# Altium PCB PCB.PcbDoc
Units mil, origin at the board's own origin, x right, y up, seen from the top; angles counter-clockwise.
Board outline 6000 x 4000 mil, 2 copper layers (Top Layer, Bottom Layer); 18 components, 11 nets, 39 pads, 0 vias.
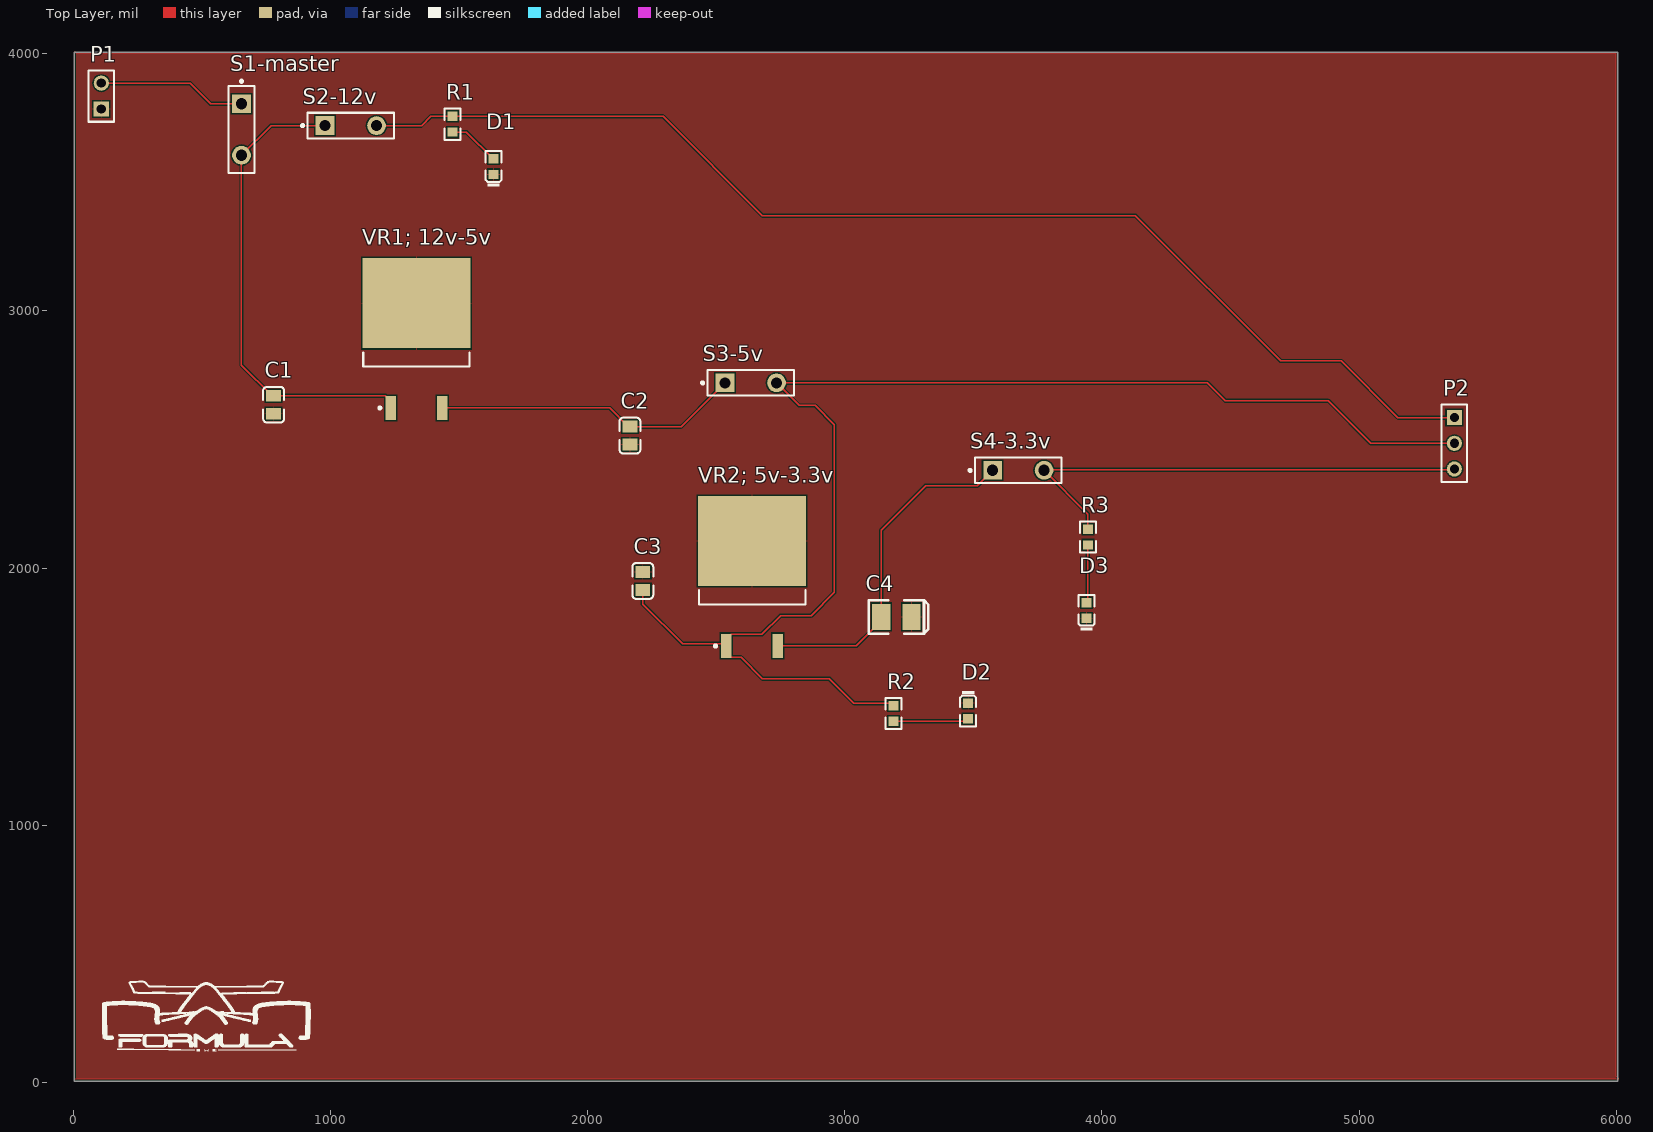
[diagram p0: Top Layer view]
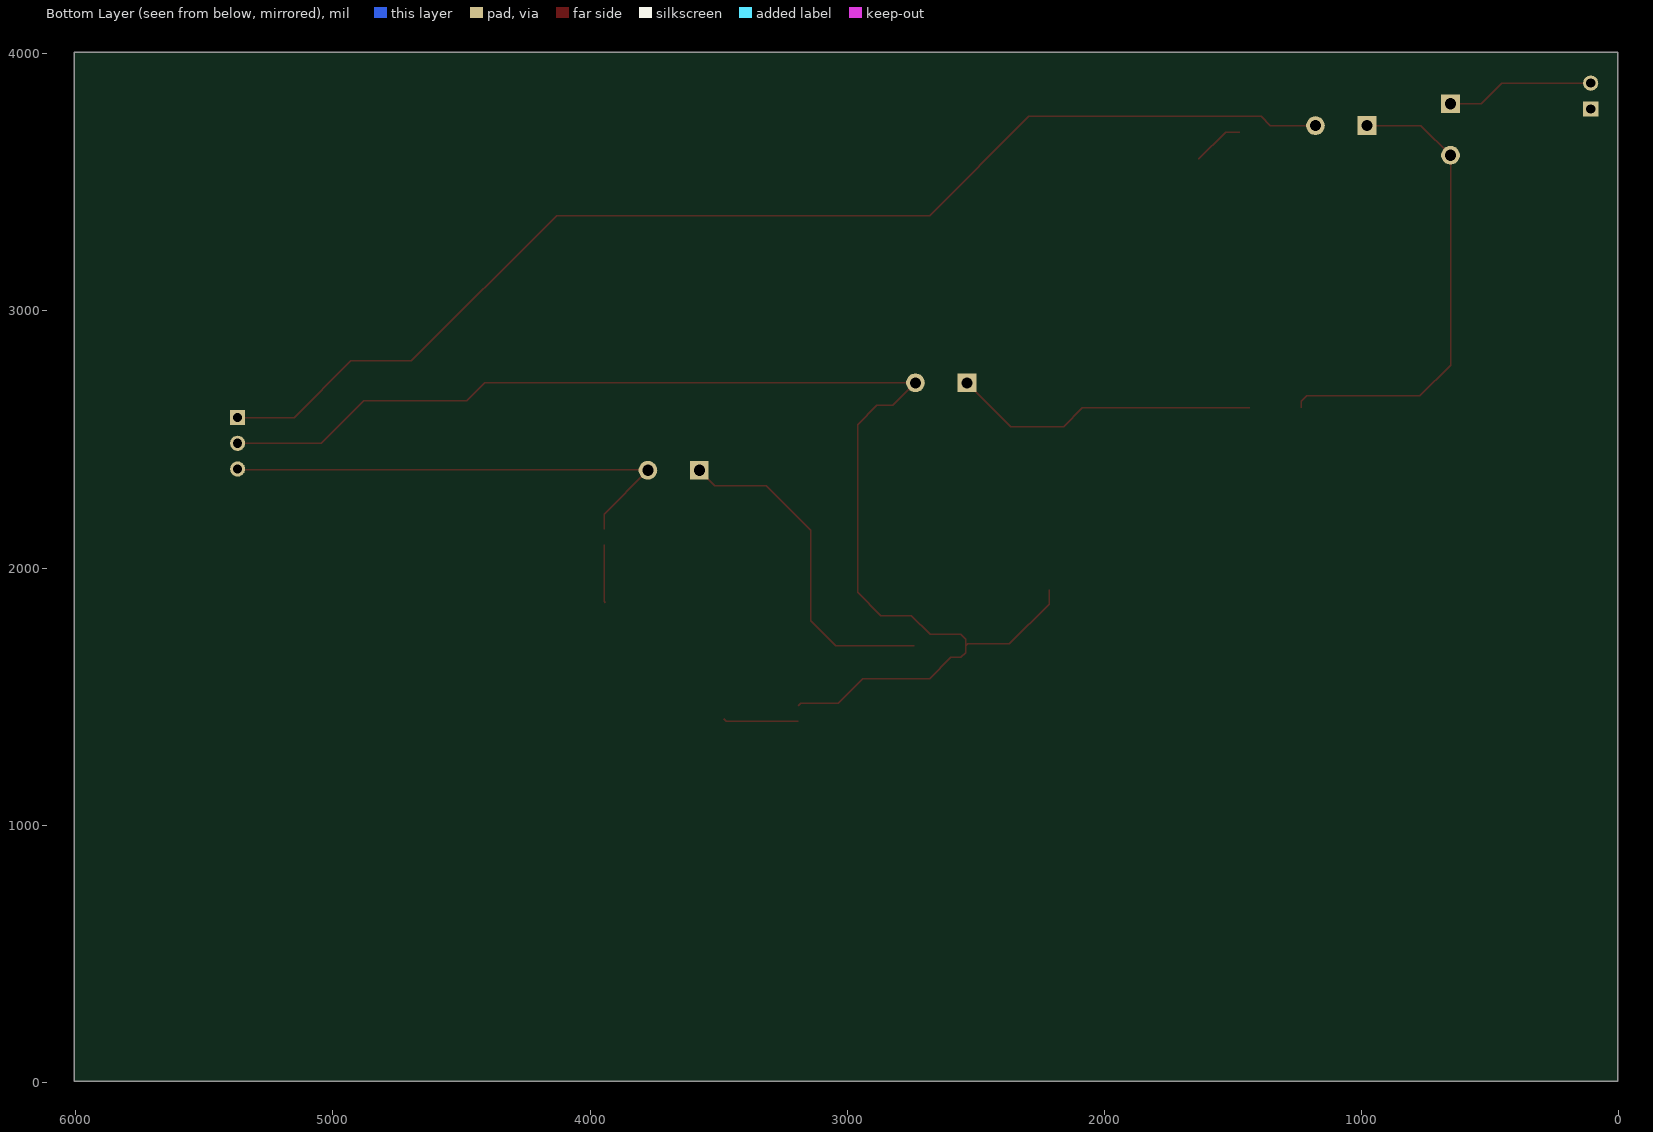
[diagram p1: Bottom Layer view, seen from below]
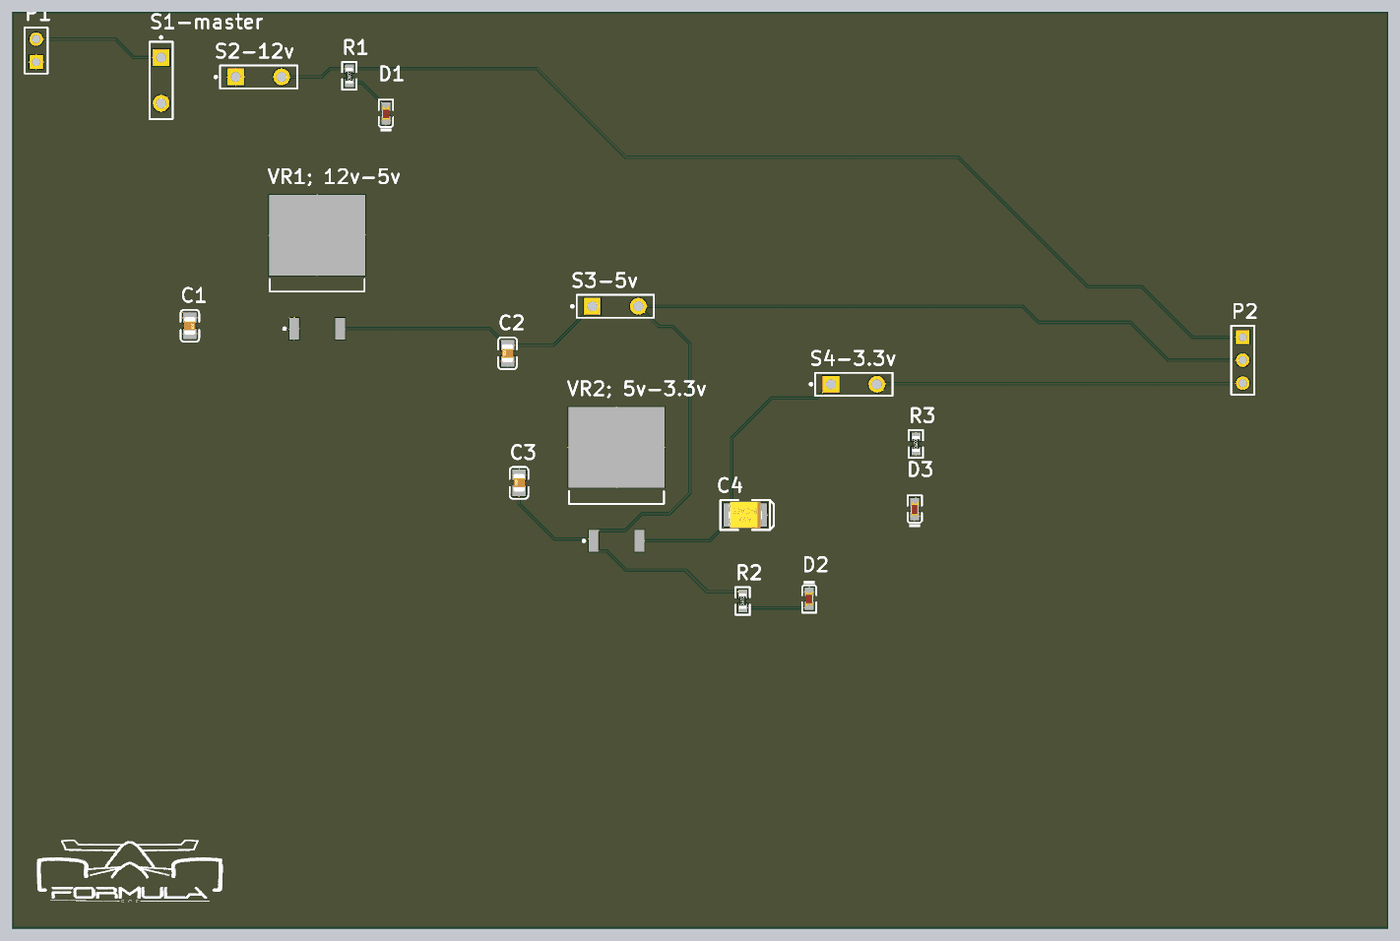
[diagram p2: 3D render of the assembled board from above, using the file's embedded part models]

## Layer stack, top to bottom
Top Solder: solder mask 0.4, Solder Resist, Dk 3.5
Top Layer: signal copper 1.4
Dielectric 1: dielectric 12.6, FR-4, Dk 4.8
Bottom Layer: signal copper 1.4
Bottom Solder: solder mask 0.4, Solder Resist, Dk 3.5

## Board outline
5,5 6005,5 6005,4005 5,4005

## Design rules (kind name [scope] priority, off if disabled: settings)
BoardOutlineClearance [All] p1: gap=7.87 ignorepadtopadclearanceinfootprint=FALSE
Clearance [All] p1: gap=5 ignorepadtopadclearanceinfootprint=FALSE except(9.84: Arc-Hole Track-Hole SMDPad-Hole THPad-Hole Via-Hole Fill-Hole Poly-Hole Region-Hole Text-Hole)
ComponentClearance [All] p1: gap=5 collisioncheckmode=3 verticalgap=5 showdistances=TRUE
DiffPairsRouting [All] p1: maxlimit=10 minlimit=5 mostfreqgap=5 toplayer_minwidth=5 toplayer_maxwidth=1000 toplayer_prefwidth=5 bottomlayer_minwidth=5 bottomlayer_maxwidth=1000 bottomlayer_prefwidth=5 maxuncoupledlength=500
Height [All] p1: minheight=0 maxheight=71497.94 prefheight=500
HoleSize [All] p1: absolutevalues=TRUE maxlimit=248.03 minlimit=11.81 maxpercent=80.000 minpercent=20.000
HoleToHoleClearance [All] p1: gap=9.84 allowstackedmicrovias=FALSE
MinimumAnnularRing [All] p1: minimumring=3
MinimumSolderMaskSliver [All] p1: minsoldermaskwidth=0
PlaneClearance [All] p1: clearance=5
PlaneConnect PlaneConnectPowerPads [InPadClass('PowerPads')] p1: planeconnectstyle=Direct reliefexpansion=20 reliefentries=4 reliefconductorwidth=10 reliefairgap=10
PlaneConnect [All] p2: pad.planeconnectstyle=Relief pad.reliefexpansion=11.81 pad.reliefentries=4 pad.reliefconductorwidth=5 pad.reliefairgap=5 via.planeconnectstyle=Direct via.reliefexpansion=11.81 via.reliefentries=4 via.reliefconductorwidth=5 via.reliefairgap=5
PolygonConnect PolygonConnectPowerPads [All vs (InPadClass('PowerPads'))] p1: connectstyle=Direct reliefconductorwidth=10 reliefentries=4 polygonreliefangle="90 Angle" airgapwidth=10
PolygonConnect [All] p2: thpad.connectstyle=Relief thpad.reliefconductorwidth=5 thpad.reliefentries=4 thpad.polygonreliefangle="90 Angle" thpad.airgapwidth=5 smdpad.connectstyle=Relief smdpad.reliefconductorwidth=5 smdpad.reliefentries=4 smdpad.polygonreliefangle="90 Angle" smdpad.airgapwidth=5 via.connectstyle=Direct via.reliefconductorwidth=5 via.reliefentries=4 via.polygonreliefangle="90 Angle" via.airgapwidth=5
RoutingVias [All] p1: holewidth=11.81 width=23.62 viastyle="Through Hole" minholewidth=11.81 minwidth=23.62 maxholewidth=23.62 maxwidth=259.84
SilkToSilkClearance [All] p1: silktosilkclearance=0
SilkToSolderMaskClearance [IsPad] p1: minsilkscreentomaskgap=5 clearancetoexposedcopper=TRUE
SolderMaskExpansion [All] p1: expansion=2.95 istentingtop=FALSE
Width [All] p1: maxlimit=1000 minlimit=5 preferedwidth=5 minimp=50.000000 maximp=50.000000 favimp=50.000000
20 further rules are at their usual default settings.

## Components (designator, comment, footprint, x,y, rotation, side; value= is the part's Value field where it differs from the comment)
C1 "470nF" 0805_C 780,2634.96 r270 top
C2 "22uF" 0805_C 2165,2515 r90 top
C3 "470nF" 0805_C 2215,1949.96 r90 top
C4 "100uF" CASE-B_3528 3200.94,1810 r0 top
D1 "0603 Green" 0603_LED_S1 1635,3560.31 r90 top
D2 "0603 Green" 0603_LED_S1 3480,1444.69 r270 top
D3 "0603 Green" 0603_LED_S1 3940,1835 r90 top
P1 "Header 2" HDR1X2 110,3785 r90 top
P2 "Header 3" HDR1X3 5370,2585 r270 top
R1 "10KΩ ±1%" 0603_R 1475,3725.31 r90 top
R2 "10KΩ ±1%" 0603_R 3190,1435 r90 top
R3 "10KΩ ±1%" 0603_R 3945,2120 r90 top
S1-master "SW-PB" SPST-2 655,3705 r270 top
S2-12v "SW-PB" SPST-2 1080,3720 r0 top
S3-5v "SW-PB" SPST-2 2635,2720 r0 top
S4-3.3v "SW-PB" SPST-2 3675,2380 r0 top
"VR1; 12v-5v" "Volt Reg" D2PAK_N 1335,2890 r90 top
"VR2; 5v-3.3v" "Volt Reg" D2PAK_N 2640,1965 r90 top

## Footprints (in the part's own frame and the unit in brackets; to place one, negate y for a bottom-side part, rotate by r counter-clockwise, add the part's x,y. Pads: shape width x height; smd on the part's side, far side on the other; paste and mask are expansions set on the pad)
0603_LED_S1 [mm]
  rect 0.93x0.98 smd: A(0.77,0) K(-0.77,0)
  silkscreen extent -1.98,-0.79 1.54,0.79, body extent -0.8,-0.4 0.8,0.4, height 0.6
0603_R [mm]
  rect 0.93x0.98 smd: 1(-0.77,0) 2(0.77,0)
  silkscreen extent -1.53,-0.79 1.54,0.79, body extent -0.85,-0.4 0.85,0.4, height 0.56
0805_C [mm]
  rect 1.16x1.47 smd: 1(-0.89,0) 2(0.89,0)
  silkscreen extent -1.77,-1.04 1.77,1.04, body extent -1,-0.62 1,0.63, height 0.77
CASE-B_3528 [mm]
  rect 1.8x2.6 smd: 1(1.5,0) 2(-1.5,0)
  silkscreen extent -2.73,-1.65 3.16,1.65, body extent -1.85,-1.47 1.85,1.46, height 2.03
D2PAK_N [mm] "D2-PAK, 4-Leads, Body 8.8x10.4mm, Pitch 2.54mm, Lead Span 15.1mm, IPC Medium Density"
  rect 2.4x1.05 smd: 1(-6.8,2.54) 3(-6.8,-2.54)
  rect 8.9x10.65 smd: 2(3.55,0)
  silkscreen extent -6.92,-5.25 -1.3,5.25, body extent -2.7,-5.28 6.3,5.28, height 4.69
HDR1X2 [mm] "Connector; Header; 2 Position"
  rect 1.5x1.5 hole 0.9: 1(0,0)
  round 1.5 hole 0.9: 2(2.54,0)
  silkscreen extent -1.27,-1.27 3.81,1.27
HDR1X3 [mm] "Connector; Header; 3 Position"
  rect 1.5x1.5 hole 0.9: 1(0,0)
  round 1.5 hole 0.9: 2(2.54,0) 3(5.08,0)
  silkscreen extent -1.27,-1.27 6.35,1.27
SPST-2 [mm] "Switch; 2 Leads"
  rect 1.85x1.85 hole 1.1: 1(-2.54,0)
  round 1.85 hole 1.1: 2(2.54,0)
  silkscreen extent -4.89,-1.27 4.28,1.27

## Part data
C1 C3: library part "0805 470nF (474) 10% 50V", "Chip capacitors", Manufacturer="Samsung Electro-Mechanics", Package=0805, PartNumber=CL21B474KBFNNNE, SuppliersPartNumber=C13967, Tolerance=10%, Voltage=50V, Capacitance=470nF, ComponentLink1Description="Supplier link", ComponentLink1URL=http://www.szlcsc.com/product/details_14623.html, Supplier=LC
C2: library part "0805 22uF (226) 20% 25V", "Chip capacitors", Manufacturer="Samsung Electro-Mechanics", Package=0805, PartNumber=CL21A226MAQNNNE, SuppliersPartNumber=C45783, Tolerance=20%, Voltage=25V, Capacitance=22uF, ComponentLink1Description="Supplier link", ComponentLink1URL=http://www.szlcsc.com/product/details_46786.html, Supplier=LC
C4: library part "3528 100uF (107) 10% 6.3V", "Tantalum capacitor", Manufacturer=AVX, Package=3528, PartNumber=TAJB107K006RNJ, SuppliersPartNumber=C16133, Tolerance=10%, Voltage=6.3V, Capacitance=100uF, ComponentLink1Description="Supplier link", ComponentLink1URL=http://www.szlcsc.com/product/details_16815.html, Supplier=LC
D1 D2 D3: library part "0603 LED Green", "LED", Color=Green, Package=0603, SuppliersPartNumber=C72043, ComponentLink1Description=供应商链接, ComponentLink1URL=http://www.szlcsc.com/product/details_73152.html, Supplier=LC
P1: "Header, 2-Pin", LatestRevisionDate=17-Jul-2002, LatestRevisionNote="Re-released for DXP Platform.", Publisher="Altium Limited"
P2: "Header, 3-Pin", LatestRevisionDate=17-Jul-2002, LatestRevisionNote="Re-released for DXP Platform.", Publisher="Altium Limited"
R1 R2 R3: library part "0603 10K (1002) 1%", "Chip resistor", Manufacturer="Uniroyal Elec", Package=0603, PartNumber=0603WAF1002T5E, Power=1/10W, Resistance=10KΩ, SuppliersPartNumber=C25804, Tolerance=1%, ComponentLink1Description="Supplier link", ComponentLink1URL=http://www.szlcsc.com/product/details_26547.html, Supplier=LC
S1-master S2-12v S3-5v S4-3.3v: "Switch", LatestRevisionDate=17-Jul-2002, LatestRevisionNote="Re-released for DXP Platform.", PackageDescription="Switch; 2 Leads", PackageReference=SPST-2, Published=24-Mar-1999, Publisher="Altium Limited"
"VR1; 12v-5v" "VR2; 5v-3.3v": "Voltage Regulator", LatestRevisionDate=29-May-2009, LatestRevisionNote="IPC-7351 Footprint Added.", PackageDescription="3-Pin Transistor Outline Package 2.54 mm Pitch, 15.1 mm Lead Span", PackageReference=D2PAK, Published=24-Mar-1999, Publisher="Altium Limited"

## Nets (pads, with @x,y where several pads share a name; then routed paths per layer and width w, separated by ;. In a path a pad name is that pad's centre, name@x,y a point inside that pad or via, vN(x,y) a via of type N, cw(c..) or ccw(c..) an arc to the next point about the centre after c; other vN are vias at no path point)
GND: "VR1; 12v-5v.2" "VR2; 5v-3.3v.2" C1.2 C2.1 C3.2 C4.1 D1.K D2.K D3.K P1.1
NetC1_1: "VR1; 12v-5v.1" C1.1 S1-master.2 S2-12v.1 | length 1853.3
  Top Layer w5: S2-12v.1 770,3720 S1-master.2 655,2788.9 773.9,2670 C1.1 1213.86,2670 1235,2648.86 1235,2622.28
NetC2_2: "VR1; 12v-5v.3" C2.2 S3-5v.1 | length 1200.3
  Top Layer w5: 1435,2622.28 2086.65,2622.28 2158.9,2550.04 C2.2 2365.04,2550.04 S3-5v.1
NetC3_1: "VR2; 5v-3.3v.1" C3.1 P2.2 R2.2 S3-5v.2 | length 5407.5
  Top Layer w5: C3.1 2215,1860 2370,1705 2532.28,1705 2540,1697.28 ; R2.2 3180.32,1475 3035,1475 2940,1570 2680,1570 2597.46,1652.54 2558.17,1652.54 2540,1670.71 2540,1697.28 ; P2.2 5045,2485 4880,2650 4480,2650 4410,2720 S3-5v.2 2822.95,2632.05 2885.03,2632.05 2960,2557.07 2960,1905 2870,1815 2750.57,1815 2677.6,1742.03 2558.17,1742.03 2540,1723.86 2540,1697.28
NetC4_2: "VR2; 5v-3.3v.3" C4.2 S4-3.3v.1 | length 1324.4
  Top Layer w5: 2740,1697.28 3044.92,1697.28 3141.89,1794.25 C4.2 3141.89,2146.89 3315,2320 3515,2320 S4-3.3v.1
NetD1_A: D1.A R1.1 | length 203.2
  Top Layer w5: R1.1 1529.65,3695 1634.02,3590.63 D1.A
NetD2_A: D2.A R2.1 | length 294
  Top Layer w5: R2.1 3470.32,1404.69 D2.A
NetD3_A: D3.A R3.1 | length 226.4
  Top Layer w5: D3.A 3945,1870.32 R3.1
NetP1_2: P1.2 S1-master.1 | length 578.1
  Top Layer w5: P1.2 455,3885 535,3805 S1-master.1
NetP2_1: P2.1 R1.2 S2-12v.2 | length 4689.6
  Top Layer w5: S2-12v.2 1355,3720 1390.63,3755.63 R1.2 2294.37,3755.63 2680,3370 4130,3370 4695,2805 4930,2805 5150,2585 P2.1
NetP2_3: P2.3 R3.2 S4-3.3v.2 | length 1897.2
  Top Layer w5: R3.2 3945,2210 S4-3.3v.2 3777.5,2382.5 5367.5,2382.5 P2.3

## Polygon pours and split planes (outlines as drawn)
GND on Top Layer "GND_L01_P001" (solid, pour order 1): 6005,4005 120,4005 5,4005 5,5 15,15 6010,15
GND on Top Layer "NONET_L01_P000" (solid, shelved, pour order 0): 5,4005 5,15 6010,15 6000,25 6000,4000 15,4000 10,4005

## Silkscreen, mask and mechanical layers (free items; w line width, h text height)
Top Overlay:
  drawing of 13 lines, arcs and shapes, not listed